# Altium PCB DSP5509_FPGACIII.PcbDoc (part 2 of 3)
Units mm, origin at the board's own origin, x right, y up, seen from the top; angles counter-clockwise.
Board outline 143.99 x 90.04 mm, 2 copper layers (Top Layer, Bottom Layer); 303 components, 256 nets, 1061 pads, 215 vias.
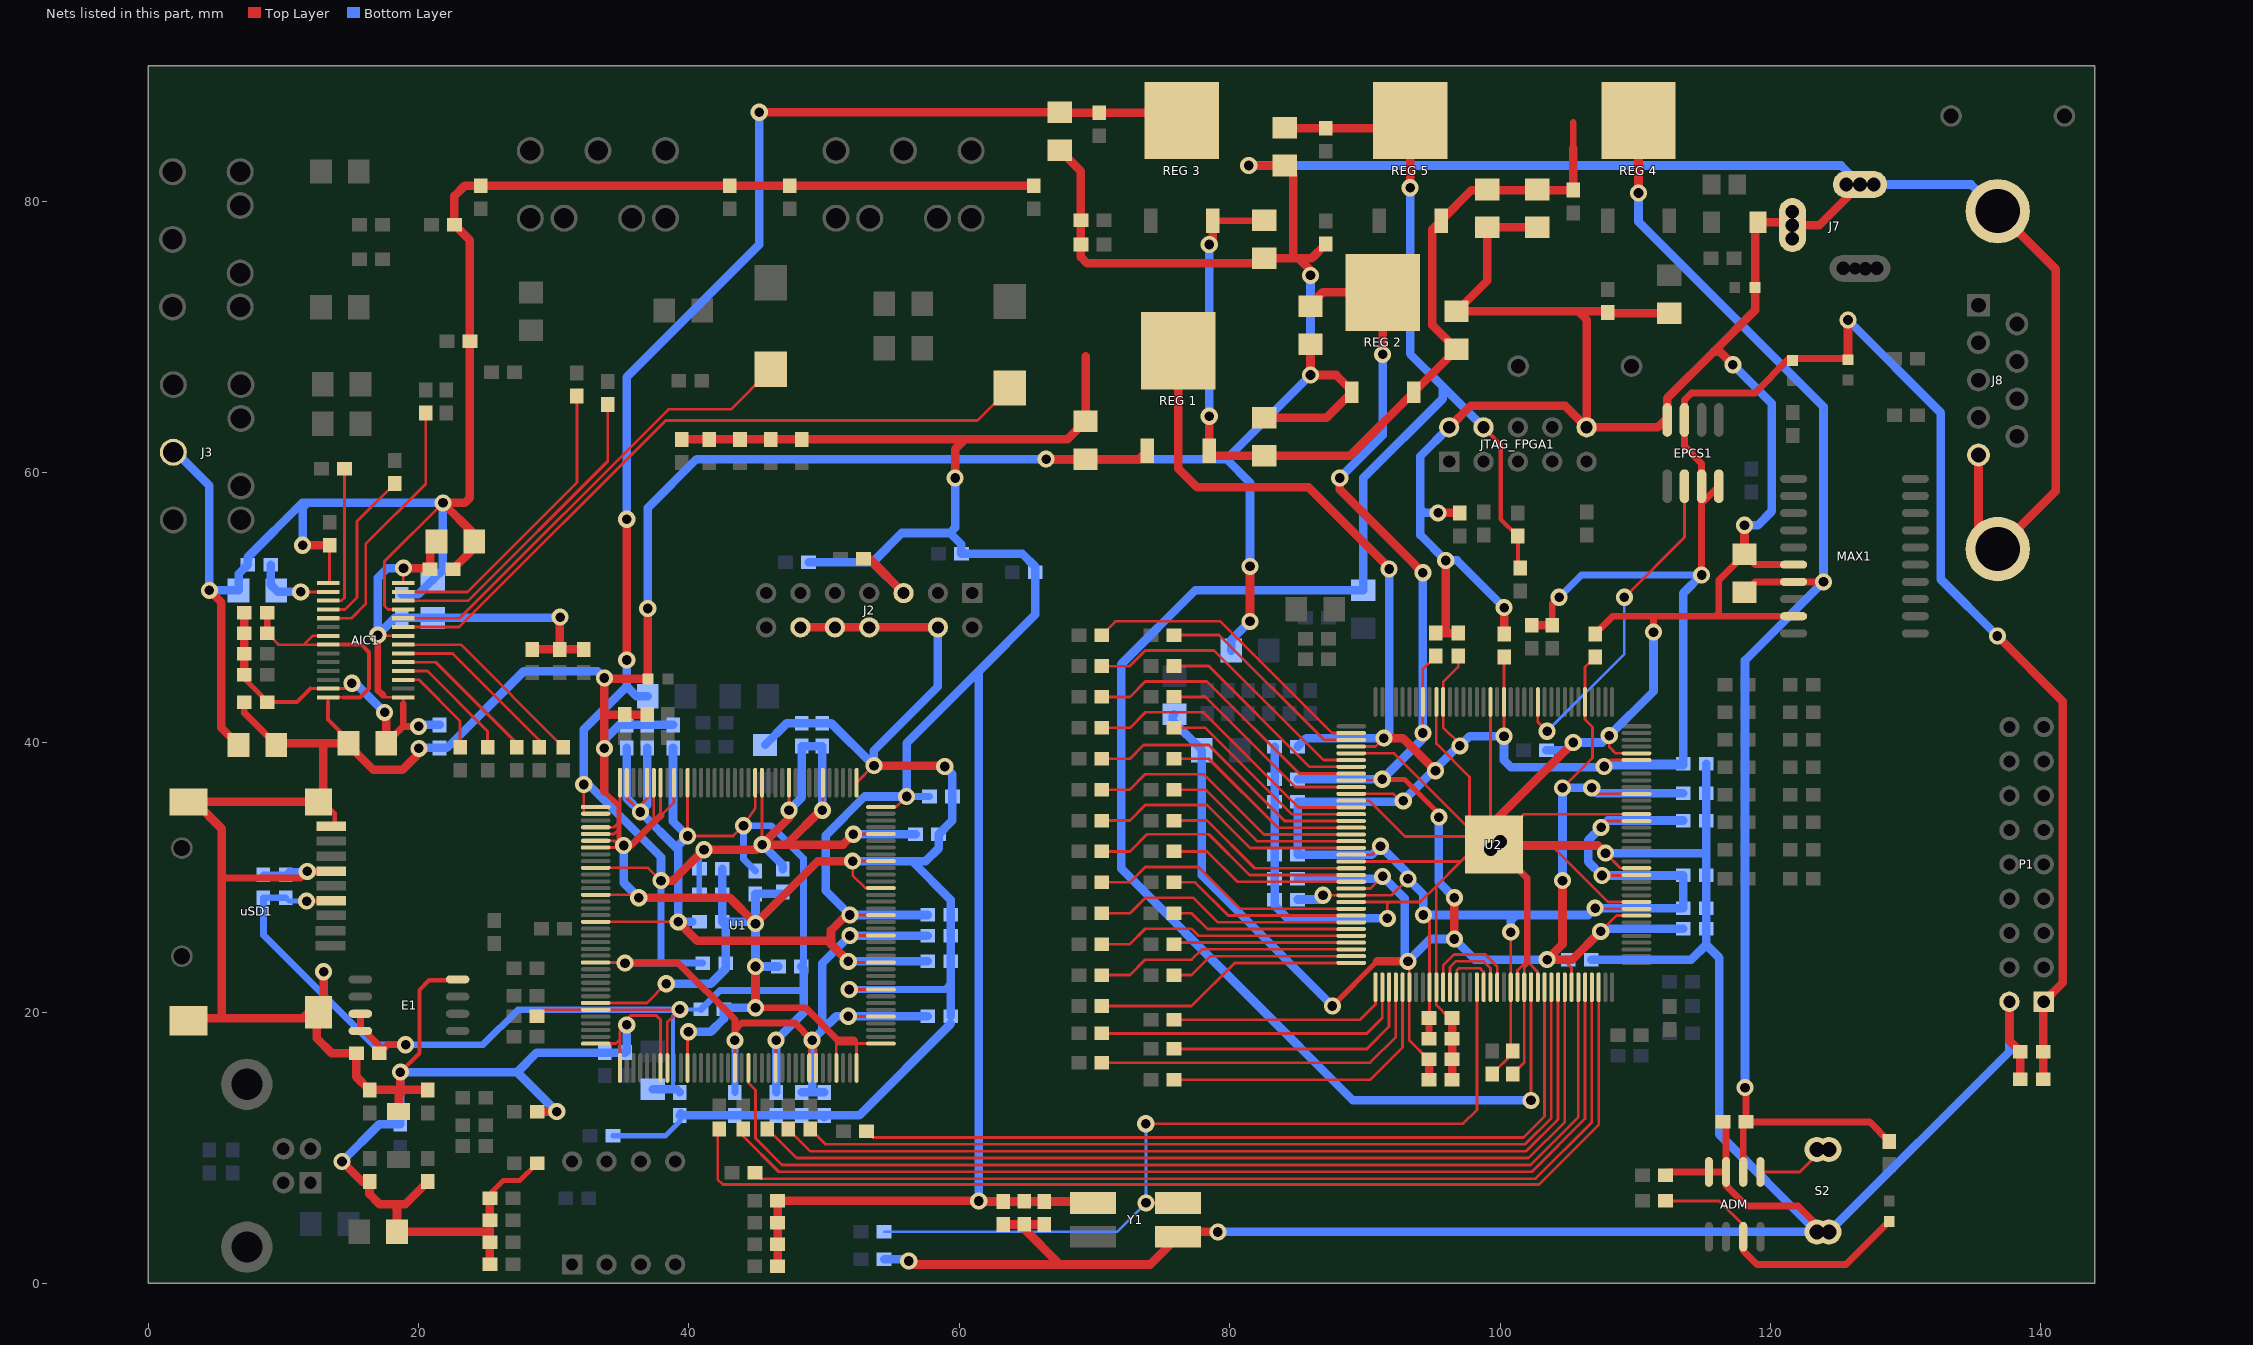
[diagram p2: the nets of this part, all layers, seen from the top]

## Via types
v1: diameter 1.27, hole 0.711, Top Layer to Bottom Layer, 197 vias
v2: diameter 0.66, hole 0.33, Top Layer to Bottom Layer, tented top, 16 vias
v3: diameter 1.5, hole 1, Top Layer to Bottom Layer, 2 vias

## Nets (pads, with @x,y where several pads share a name; then routed paths per layer and width w, separated by ;. In a path a pad name is that pad's centre, name@x,y a point inside that pad or via, vN(x,y) a via of type N, cw(c..) or ccw(c..) an arc to the next point about the centre after c; other vN are vias at no path point)
+3.3V: "REG 1.4" C17.1 C30.1 C31.1 C32.1 C33.2 C34.2 C35.1 C36.1 C37.1 C38.1 C39.1 C40.1 C41.1 C42.1 C43.1 C44.1 C45.1 C46.1 C47.1 C48.1 C49.1 C50.1 C51.1 C52.1 C53.1 C54.1 C55.1 C56.2 C69.1 C71.1 C72.1 C83.1 C112.2 C113.2 D6.1 D7.1 E1.7 E1.8 EPCS1.3 EPCS1.7 EPCS1.8 FB3.2 J2.5 P1.1 R10.2 R11.2 R12.2 R13.2 R14.2 R15.2 R16.2 R17.2 R25.1 R50.2 R51.2 R52.2 R53.2 R54.2 R116.1 R117.1 R118.1 U1.8 U1.24 U1.49 U1.56 U1.72 U1.88 U1.98 U1.104 U1.107 U1.126 U1.139 U2.17 U2.26 U2.40 U2.47 U2.56 U2.62 U2.81 U2.93 U2.117 U2.122 U2.130 U2.139 uSD1.4 Y1.4 | length 718.6
  Top Layer w0.203: R25.1@28.759,19.753 29.24,20.234 U1.139@33.107,20.234 ; U1.126@33.107,26.734 33.111,26.738 v1(39.212,26.738) ; U1.139@33.134,20.261 U1.139@33.107,20.234 ; U1.107@35.407,37.034 35.407,35.877 v1@36.164,35.12 ; v1(36.418,34.866) v1@36.164,35.12 ; U1.104@36.907,37.034 36.907,35.863 v1@36.164,35.12 ; U1.8@38.45,15.891 U1.8@38.407,15.934 38.407,19.329 39.312,20.234 U1.139@33.107,20.234 ; U1.98@39.907,37.034 v1(39.907,33.088) 43.276,33.088 v1(44.038,33.85) 44.907,35.14 U1.88@44.907,37.034 ; R53.2@41.498,62.425 R52.2@43.784,62.425 R51.2@46.07,62.425 ; U1.24@46.407,15.934 46.451,15.978 v1(46.451,17.975) ; v1(51.785,23.817) 51.868,23.734 U1.49@54.207,23.734 ; v1(51.912,27.246) 54.195,27.246 U1.56@54.207,27.234 ; U1.72@54.207,35.234 55.328,35.234 v1(56.103,36.009) ; v1(86.904,28.703) 91.977,28.703 v1(93.187,29.913) ; U2.47@88.987,36.203 92.104,36.203 92.679,35.628 v1@92.778,35.628 ; U2.56@88.999,31.691 U2.56@88.987,31.703 90.532,31.703 v1(91.155,32.326) ; U2.40@88.998,39.692 U2.40@88.987,39.703 90.785,39.703 v1(91.409,40.327) ; v1(94.33,27.246) 94.787,26.789 C50.1@94.787,19.753 ; U2.26@95.787,42.045 U2.26@95.787,43.003 ; U2.26@95.787,42.172 U2.26@95.787,43.003 ; C45.1@96.901,46.394 96.901,45.593 95.787,44.479 U2.26@95.787,43.003 ; v1(97.028,39.751) 97.028,39.878 95.787,41.119 U2.26@95.787,43.003 ; R116.1@99.371,15.435 R116.1@99.41,15.474 ; R116.1@99.41,15.65 R116.1@99.41,15.474 ; v1(100.287,40.466) U2.17@100.287,43.003 ; U2.17@100.287,42.867 U2.17@100.287,43.003 ; C44.1@100.287,46.323 U2.17@100.287,43.003 ; U2.17@100.299,42.991 U2.17@100.287,43.003 ; v1@100.787,26.21 v1(100.787,25.976) 100.787,17.321 C51.1@100.934,17.174 100.934,16.998 R116.1@99.41,15.474 ; v1@107.03,27.703 U2.117@110.087,27.703 ; v1(107.475,33.723) 107.955,34.203 U2.130@110.087,34.203 ; v1(107.538,30.167) 110.051,30.167 U2.122@110.087,30.203 ; v1(107.696,38.227) 108.172,38.703 U2.139@110.087,38.703
  Top Layer w0.381: v1(11.73,28.268) uSD1.4@13.815,28.268
  Top Layer w0.508: E1.7@15.704,19.939 E1.8@15.704,18.669 16.002,18.669 17.106,17.565 C17.1@17.106,17.018 17.741,17.653 v1(19.05,17.653) ; C83.1@94.75,18.102 C50.1@94.75,19.626 ; 103.855,49.852 R118.1@103.855,48.67 103.855,50.233 v1(104.363,50.741) ; v1(114.904,52.392) EPCS1.7@114.904,57.853 ; EPCS1.8@116.174,58.959 115.068,57.853 EPCS1.7@114.904,57.853 ; D7.1@125.73,68.394 121.381,68.394 118.841,65.854 114.142,65.854 113.634,65.346 EPCS1.3@113.634,63.859 113.634,61.917 114.904,60.647 EPCS1.7@114.904,58.959 EPCS1.7@114.904,57.853
  Top Layer w0.635: v1(39.212,26.738) 40.609,25.341 50.515,25.341 ; R54.2@39.466,62.425 R53.2@41.498,62.425 R52.2@43.784,62.425 R51.2@46.07,62.425 R50.2@48.356,62.425 60.421,62.425 ; R14.2@46.57,1.27 R15.2@46.57,2.879 R16.2@46.57,4.487 R17.2@46.57,6.096 v1(61.437,6.096) 61.476,6.057 C32.1@63.246,6.057 C30.1@66.294,6.057 69.767,6.057 Y1.4@69.875,5.949 ; v1(51.785,23.817) 50.515,25.087 50.515,25.341 ; v1(51.912,27.246) 51.658,27.246 50.515,26.103 50.515,25.341 ; R13.2@52.92,53.594 53.34,53.594 J2.5@55.88,51.054 ; v1@59.69,59.69 59.69,61.694 60.421,62.425 ; 69.342,68.58 C69.1@69.342,63.757 68.01,62.425 60.421,62.425 ; Y1.4@69.81,6.057 Y1.4@69.85,6.017 ; 76.2,68.978 76.2,60.266 77.597,58.869 85.852,58.869 91.79,52.931 v1(91.79,52.832) ; v1(91.409,40.327) 92.806,40.327 v1(95.219,37.914) ; R117.1@102.331,48.67 R118.1@103.855,48.67 ; D7.1@125.73,68.394 v1(125.73,71.247) ; v1(136.779,47.879) 141.605,43.053 141.605,22.225 P1.1@140.208,20.828 140.169,20.789 C113.2@140.169,17.145 C112.2@140.169,15.113
  Bottom Layer w0.203: C40.1@44.546,30.89 C40.1@44.927,30.509
  Bottom Layer w0.305: 38.831,14.634 38.831,19.753 v1@39.312,20.234 ; C36.1@39.303,14.126 C36.1@39.339,14.126 ; v1(39.339,20.261) C43.1@40.902,20.261
  Bottom Layer w0.381: C34.2@10.191,28.518 10.441,28.268 v1(11.73,28.268)
  Bottom Layer w0.508: C34.2@10.191,28.518 C33.2@8.54,28.518 8.54,25.75 16.637,17.653 v1(19.05,17.653) 24.765,17.653 27.346,20.234 v1@39.312,20.234 ; C43.1@40.902,20.261 42.299,21.658 48.229,21.658 48.483,21.404 ; C40.1@44.927,30.509 44.038,31.398 v1(44.038,33.85) 46.07,33.85 48.483,31.437 48.483,23.602 C56.2@48.317,23.436 ; v1(56.103,36.009) C35.1@57.793,36.009 ; v1(104.363,50.741) 106.014,52.392 v1(114.904,52.392)
  Bottom Layer w0.635: C72.1@35.402,39.604 35.402,35.882 v1(36.418,34.866) ; C71.1@36.926,39.604 36.926,35.374 v1(36.418,34.866) ; FB3.2@37.338,14.348 39.117,14.348 C36.1@39.339,14.126 ; C41.1@38.831,39.604 38.831,34.164 v1(39.907,33.088) 39.212,32.393 39.212,32.072 ; C42.1@40.267,26.738 v1(39.212,26.738) 39.212,32.072 ; C39.1@46.451,14.126 v1(46.451,17.975) 48.483,20.007 48.483,21.404 48.483,23.27 C56.2@48.317,23.436 ; R12.2@48.856,53.34 53.594,53.34 ; v1(51.785,23.817) C37.1@57.666,23.817 ; J2.5@55.88,51.054 53.594,53.34 ; C38.1@57.666,27.246 v1(51.912,27.246) 50.134,29.024 50.134,33.147 52.996,36.009 v1(56.103,36.009) 56.103,39.946 60.212,44.055 ; v1(59.69,59.563) 59.69,55.88 59.309,55.499 ; 60.226,44.069 61.437,45.28 ; 61.437,6.731 61.437,45.28 ; C49.1@85.02,28.389 86.59,28.389 v1(86.904,28.703) ; C46.1@85.02,39.692 85.655,40.327 v1(91.409,40.327) 91.79,40.708 v1(91.79,52.832) ; v1@96.901,39.751 v1(92.837,35.687) 92.778,35.628 C47.1@85.02,35.628 C48.1@85.02,31.691 90.52,31.691 v1(91.155,32.326) 93.187,30.294 v1(93.187,29.913) 94.33,28.77 v1(94.33,27.246) 101.188,27.246 ; v1(97.028,39.751) 97.743,40.466 v1(100.287,40.466) 100.287,38.688 100.807,38.168 ; v1(100.787,25.976) 100.787,26.845 101.188,27.246 ; 106.934,38.168 100.807,38.168 ; 108.339,38.334 C55.1@113.546,38.334 ; C54.1@113.546,34.231 107.983,34.231 v1(107.475,33.723) 106.527,32.775 106.527,31.178 v1(107.538,30.167) C52.1@113.546,30.167 C53.1@113.546,27.754 v1(107.03,27.754) 106.522,27.246 101.188,27.246 ; v1(114.904,52.392) 113.546,51.034 C55.1@113.546,38.422 107.891,38.422 v1(107.696,38.227) 107.637,38.168 100.807,38.168 ; v1(125.73,71.247) 132.588,64.389 132.588,52.07 v1(136.779,47.879) ; v1(36.418,34.866) 39.212,32.072 ; 53.594,53.34 55.753,55.499 59.309,55.499 ; 59.309,55.499 60.159,54.649 R11.2@60.159,53.975 64.643,53.975 65.62,52.998 R10.2@65.62,52.578 65.62,49.463 61.437,45.28
+5V: "REG 1.3" "REG 2.3" "REG 3.3" "REG 4.4" "REG 5.3" ADM.2 C27.2 C70.1 C82.1 C84.1 C87.1 C89.1 C111.1 MAX1.7 R46.2 R67.2 | length 172.1
  Top Layer w0.508: 78.739,78.596 C84.1@82.53,78.596 ; 105.41,83.947 105.41,85.852 ; 110.236,83.947 110.236,85.996 ; ADM.2@117.983,8.242 117.983,11.723 C27.2@118.198,11.938 ; C111.1@118.079,51.119 118.844,51.884 MAX1.7@121.707,51.884 v1(123.921,51.884) ; v1(118.11,14.478) 118.198,14.39 C27.2@118.198,11.938 ; R46.2@128.778,10.502 127.342,11.938 C27.2@118.198,11.938
  Top Layer w0.635: v1(78.486,76.835) 78.739,77.088 78.739,78.596 ; 105.41,83.947 R67.2@105.41,80.86 102.743,80.86 97.894,80.86 95.63,78.596 94.996,77.962 94.996,70.863 C82.1@96.774,69.085 96.774,69.072 93.598,65.896 88.913,61.211 C70.1@82.55,61.211 78.852,61.211 78.485,61.578 v1(78.486,64.135) ; v1(110.236,80.645) 110.236,83.947 ; v1(78.486,64.135) v1(78.486,64.135)
  Bottom Layer w0.635: v1(78.486,64.135) v1(78.486,76.835) ; v1(110.236,80.645) 110.236,78.523 123.921,64.838 v1(123.921,51.884) 118.11,46.073 v1(118.11,14.478)
A0: R89.2 U2.64 | length 20.2
  Top Layer w0.203: R89.2@70.542,29.659 72.613,29.659 73.756,30.802 77.693,30.802 80.792,27.703 U2.64@88.987,27.703
A1: R91.2 U2.65 | length 14.1
  Top Layer w0.203: R91.2@75.876,29.659 77.439,29.659 79.895,27.203 U2.65@88.987,27.203
A2: R93.2 U2.66 | length 19.7
  Top Layer w0.203: R93.2@70.542,27.373 72.613,27.373 73.756,28.516 77.312,28.516 79.125,26.703 U2.66@88.987,26.703
A3: R94.2 U2.67 | length 13.6
  Top Layer w0.203: R94.2@75.876,27.373 77.185,27.373 78.355,26.203 U2.67@88.987,26.203
A4: R95.2 U2.68 | length 19.1
  Top Layer w0.203: R95.2@70.542,25.087 72.613,25.087 73.756,26.23 77.185,26.23 77.712,25.703 U2.68@88.987,25.703
A5: R96.2 U2.69 | length 13.2
  Top Layer w0.203: R96.2@75.876,25.087 75.992,25.203 U2.69@88.987,25.203
A6: R97.2 U2.70 | length 19.2
  Top Layer w0.203: R97.2@70.542,22.801 72.613,22.801 73.756,23.944 77.185,23.944 77.944,24.703 U2.70@88.987,24.703
A7: R99.2 U2.71 | length 13.7
  Top Layer w0.203: R99.2@75.876,22.801 77.185,22.801 78.587,24.203 U2.71@88.987,24.203
A8: R100.2 U2.72 | length 19.8
  Top Layer w0.203: R100.2@70.542,20.515 77.185,20.515 80.373,23.703 U2.72@88.987,23.703
A9: R101.2 U2.73 | length 16.6
  Top Layer w0.203: R101.2@75.876,19.499 89.644,19.499 90.787,20.642 U2.73@90.787,21.903
A10: R102.2 U2.74 | length 23.5
  Top Layer w0.203: R102.2@70.542,18.483 77.947,18.483 90.139,18.483 91.287,19.631 U2.74@91.287,21.903
A11: R104.2 U2.75 | length 19.5
  Top Layer w0.203: R104.2@75.876,17.34 90.139,17.34 91.787,18.988 U2.75@91.787,21.903
A12: R106.2 U2.76 | length 26.2
  Top Layer w0.203: R106.2@70.542,16.324 90.393,16.324 92.287,18.218 U2.76@92.287,21.903
A13: R107.2 U2.77 | length 22.4
  Top Layer w0.203: R107.2@75.876,15.054 90.393,15.054 92.787,17.448 U2.77@92.787,21.903
AIC3.3V: AIC1.1 AIC1.8 AIC1.14 AIC1.27 C11.1 C12.1 C13.1 C14.1 C15.1 C16.1 C18.1 R24.2 R30.2 R32.2 R40.1 R41.1 R47.1 R48.1 | length 66.7
  Top Layer w0.203: 12.015,43.991 AIC1.27@13.323,43.991 14.682,43.991 v1(15.082,44.391) ; v1(16.987,47.947) 17.043,47.891 AIC1.8@18.873,47.891 ; 17.368,43.502 17.529,43.341 AIC1.1@18.873,43.341 18.873,42.867 ; AIC1.14@18.873,51.791 v1@18.873,52.881 ; v1(20.013,41.194) v1@20.035,41.216
  Top Layer w0.305: C16.1@8.82,42.994 11.018,42.994 12.015,43.991
  Top Layer w0.381: R48.1@7.12,44.733 C16.1@8.82,43.033
  Top Layer w0.508: R48.1@7.12,44.733 R48.1@7.12,45.026 ; C16.1@8.82,42.994 C16.1@8.82,43.033 ; v1(16.987,47.947) 16.987,43.883 17.368,43.502 ; C14.1@17.625,39.946 18.873,41.194 ; 18.873,42.867 18.873,41.194 ; v1(20.013,41.194) 18.873,41.194
  Top Layer w0.635: R48.1@7.12,45.026 R47.1@7.12,46.55 R40.1@7.12,48.074 R41.1@7.12,49.598 ; C14.1@17.625,39.946 v1@17.625,42.102 ; v1(18.892,52.9) C11.1@20.667,52.9 ; C11.1@20.867,52.832 20.867,54.398 C12.1@21.333,54.864 ; R32.2@28.417,46.892 R24.2@30.449,46.892 ; v1@30.449,49.276 R24.2@30.449,46.892 ; R30.2@32.227,46.892 R24.2@30.449,46.892
  Bottom Layer w0.203: v1@15.082,44.01 v1(15.082,44.391) ; v1(20.013,41.194) v1@20.123,41.304 ; C18.1@21.051,49.214 C18.1@21.054,49.214 ; C18.1@21.051,49.256 C18.1@21.266,49.256
  Bottom Layer w0.635: v1(15.082,44.391) 15.336,44.391 v1(17.495,42.232) ; v1(18.892,52.9) 17.721,52.9 16.987,52.166 v1(16.987,47.947) 18.254,49.214 C18.1@21.051,49.214 21.054,49.214 v1@30.48,49.214 ; v1@20.123,41.304 C13.1@21.559,41.304
  other v1: 30.48,49.276
AOE: R88.1 U2.105 | length 73.8
  Top Layer w0.203: R88.1@44.888,8.196 45.337,7.747 102.616,7.747 106.787,11.918 U2.105@106.787,21.903 U2.105@106.776,21.892
ARDY: U1.20 U2.103 | length 78.1
  Top Layer w0.203: U1.20@44.407,15.934 44.407,14.812 44.927,14.292 44.927,10.736 46.9,8.763 102.235,8.763 105.787,12.315 U2.103@105.787,21.903
ARE: R90.1 U2.106 | length 81.1
  Top Layer w0.203: R90.1@42.26,11.41 42.133,11.283 42.133,7.688 42.514,7.307 102.87,7.307 107.287,11.724 U2.106@107.287,21.903 U2.106@107.284,21.9
AWE: R92.1 U2.104 | length 75.2
  Top Layer w0.203: R92.1@44.038,11.41 44.038,10.863 46.646,8.255 102.362,8.255 106.287,12.18 U2.104@106.287,21.903
BE0: R103.1 U2.100 | length 68.4
  Top Layer w0.203: R103.1@47.34,11.41 48.971,9.779 101.933,9.779 104.287,12.133 U2.100@104.287,21.903
BE1: R105.1 U2.99 | length 66
  Top Layer w0.203: R105.1@48.991,11.117 R105.1@48.991,11.41 50.114,10.287 101.854,10.287 103.787,12.22 U2.99@103.787,21.903
CE2: R98.1 U2.101 | length 70.9
  Top Layer w0.203: R98.1@45.816,11.41 47.955,9.271 102.108,9.271 104.787,11.95 U2.101@104.787,21.903
CLK4: U2.83 U2.91 | length 7.9
  Top Layer w0.203: U2.83@95.787,21.903 95.787,23.524 96.588,24.325 98.902,24.325 99.787,23.44 U2.91@99.787,21.903
CLK5: U2.84 U2.90 | length 6.3
  Top Layer w0.203: U2.84@96.287,21.903 96.287,23.389 96.715,23.817 98.775,23.817 99.287,23.305 U2.90@99.287,21.903
CLK6: U2.85 U2.89 | length 4.5
  Top Layer w0.203: U2.85@96.787,21.903 96.787,23.127 96.969,23.309 98.521,23.309 98.787,23.043 U2.89@98.787,21.903
CLK12MHZ: R59.1 U2.88 Y1.3 | length 62.9
  Top Layer w0.203: v1@73.787,5.969 v1(73.807,5.949) Y1.3@76.175,5.949 ; v1(73.787,11.811) 97.271,11.811 98.287,12.827 98.287,14.546 ; U2.88@98.267,21.883 U2.88@98.287,21.903 98.287,14.546 ; 98.287,14.165 98.287,14.546
  Bottom Layer w0.203: R59.1@54.444,3.81 71.668,3.81 v1(73.807,5.949) v1@73.807,11.791
CLKMEM: R87.1 U2.98 | length 60.5
  Top Layer w0.203: R87.1@53.143,11.244 53.592,10.795 101.727,10.795 103.287,12.355 U2.98@103.287,21.903
D0: R71.1 U2.60 | length 14
  Top Layer w0.203: R71.1@75.876,31.945 78.328,31.945 80.57,29.703 U2.60@88.987,29.703
D1: R73.1 U2.59 | length 20.2
  Top Layer w0.203: R73.1@70.542,31.945 72.613,31.945 73.883,33.215 78.455,33.215 81.467,30.203 U2.59@88.987,30.203
D2: R75.1 U2.58 | length 14.6
  Top Layer w0.203: R75.1@75.876,34.231 78.328,34.231 81.856,30.703 U2.58@88.987,30.703
D3: R77.1 U2.55 | length 20.2
  Top Layer w0.203: R77.1@70.542,34.231 72.613,34.231 73.756,35.374 78.328,35.374 81.499,32.203 U2.55@88.987,32.203
D4: R79.1 U2.54 | length 14.7
  Top Layer w0.203: R79.1@75.876,36.517 78.201,36.517 82.015,32.703 U2.54@88.987,32.703
D5: R81.1 U2.53 | length 20.8
  Top Layer w0.203: R81.1@70.542,36.517 72.613,36.517 73.756,37.66 78.074,37.66 82.531,33.203 U2.53@88.987,33.203
D6: R83.1 U2.52 | length 15.2
  Top Layer w0.203: R83.1@75.876,38.803 78.455,38.803 83.555,33.703 U2.52@88.987,33.703
D7: R85.1 U2.51 | length 21.2
  Top Layer w0.203: R85.1@70.542,38.803 72.613,38.803 73.629,39.819 78.455,39.819 84.071,34.203 U2.51@88.987,34.203
D8: R72.2 U2.50 | length 15.8
  Top Layer w0.203: R72.2@75.876,41.089 78.201,41.089 84.587,34.703 U2.50@88.987,34.703
D9: R74.2 U2.49 | length 21.8
  Top Layer w0.203: R74.2@70.542,41.089 72.613,41.089 73.756,42.232 78.074,42.232 85.103,35.203 U2.49@88.987,35.203
D10: R76.2 U2.46 | length 16.4
  Top Layer w0.203: R76.2@75.876,43.375 78.201,43.375 84.873,36.703 86.583,36.703 ; 86.016,36.703 86.583,36.703 ; U2.46@88.987,36.703 86.583,36.703
D11: R78.2 U2.44 | length 21.7
  Top Layer w0.203: R78.2@70.542,43.375 72.613,43.375 73.756,44.518 78.328,44.518 85.143,37.703 U2.44@88.987,37.703
D12: R80.2 U2.43 | length 16.2
  Top Layer w0.203: R80.2@75.876,45.661 78.455,45.661 85.913,38.203 U2.43@88.987,38.203
D13: R82.2 U2.42 | length 22.3
  Top Layer w0.203: R82.2@70.561,45.644 72.596,45.644 73.756,46.804 78.836,46.804 86.937,38.703 U2.42@88.987,38.703
D14: R84.2 U2.39 | length 16.6
  Top Layer w0.203: R84.2@75.876,47.947 79.217,47.947 86.961,40.203 U2.39@88.987,40.203 ; U2.39@88.987,40.2 U2.39@89.25,40.2
D15: R86.2 U2.38 | length 22.3
  Top Layer w0.203: R86.2@70.542,47.947 71.558,48.963 79.307,48.963 87.567,40.703 U2.38@88.987,40.703
DCLK: EPCS1.6 U2.12 | length 24.8
  Top Layer w0.203: U2.12@102.787,43.003 102.787,41.522 v1(103.474,40.835) ; v1(109.189,50.741) 113.634,55.186 EPCS1.6@113.634,58.959
  Bottom Layer w0.203: v1(103.474,40.835) 109.189,46.55 v1(109.189,50.741)
DSP_CVCC: "REG 3.4" C57.2 C58.1 C59.1 C60.1 C61.1 C62.1 C63.1 C64.1 C65.1 C66.1 C67.1 C68.1 C85.1 FB2.1 R63.2 U1.18 U1.29 U1.30 U1.41 U1.53 U1.68 U1.78 U1.83 U1.87 U1.109 U1.110 U1.118 U1.132 | length 236.2
  Top Layer w0.203: v1(32.227,36.898) 32.227,34.866 32.359,34.734 U1.110@33.107,34.734 ; U1.132@33.107,23.734 v1@35.231,23.734 ; U1.118@33.107,30.734 36.994,30.734 v1(37.942,29.786) ; U1.18@43.407,15.934 v1@43.407,17.967 ; v1@45.407,32.481 U1.87@45.407,37.034 ; v1(47.407,34.993) U1.83@47.407,37.034 ; U1.29@48.907,15.934 48.907,17.764 49.407,17.264 U1.30@49.407,15.934 U1.30@49.372,15.899 ; U1.78@49.88,37.007 U1.78@49.907,37.034 v1@49.907,35.147 ; v1@51.804,19.734 U1.41@54.207,19.734 ; v1@51.924,25.734 U1.53@54.207,25.734 ; v1@52.185,33.234 U1.68@54.207,33.234
  Top Layer w0.508: v1(35.275,23.69) 39.212,23.69 43.403,19.499 43.403,18.737 ; v1(43.403,17.971) 43.403,18.737 ; v1(49.118,17.975) 47.848,19.245 43.911,19.245 43.403,18.737
  Top Layer w0.635: v1(35.402,46.101) v1(35.402,56.515) ; v1(37.942,29.786) 38.831,29.786 v1(41.117,32.072) 44.998,32.072 v1@45.407,32.481 ; v1(45.212,86.614) 45.215,86.617 C85.1@67.437,86.617 67.479,86.575 R63.2@70.358,86.575 75.875,86.575 76.454,85.996 ; v1(47.407,34.993) 47.407,34.425 v1(45.435,32.453) 47.213,32.453 ; v1@49.907,35.147 47.213,32.453 ; v1(52.166,33.215) 51.404,32.453 47.213,32.453
  Bottom Layer w0.381: C57.2@40.775,28.77 C59.1@40.775,30.675 40.775,31.73 v1(41.117,32.072)
  Bottom Layer w0.508: v1(35.275,23.69) 37.942,23.69 ; v1(37.942,29.786) 37.942,23.69 ; C58.1@41.029,23.69 37.942,23.69 ; C65.1@43.403,14.126 v1(43.403,17.971)
  Bottom Layer w0.635: v1(35.402,46.101) 35.402,44.137 ; v1(35.402,56.515) 35.402,67.025 45.212,76.835 v1(45.212,86.614) ; FB2.1@36.954,43.434 36.105,43.434 35.402,44.137 ; v1(37.942,29.786) 37.942,31.527 32.571,36.898 v1(32.227,36.898) 32.227,40.962 35.402,44.137 ; v1(45.435,32.453) 46.959,30.929 C61.1@46.959,30.636 ; v1(47.407,34.993) 48.356,35.942 C60.1@48.356,39.731 C63.1@49.88,39.731 v1(49.88,34.993) ; C66.1@48.356,14.126 49.118,14.126 ; C67.1@50.007,14.126 49.118,14.126 ; v1(52.166,33.215) C64.1@56.777,33.215 ; C68.1@57.666,19.753 v1(51.785,19.753) 50.896,19.753 49.88,18.737 ; C62.1@57.666,25.722 v1(51.912,25.722) 49.88,23.69 49.88,18.737 ; 49.118,14.126 v1(49.118,17.975) 49.88,18.737
FPGA_VCCA_2.5V: "REG 5.4" C90.1 FB14.2 JTAG_FPGA1.4 R69.2 R110.2 R112.2 U2.96 | length 146.7
  Top Layer w0.203: v1(102.287,13.53) U2.96@102.287,21.903
  Top Layer w0.305: JTAG_FPGA1.4@98.775,63.314 100.045,62.044 100.045,56.515 101.208,55.352 101.315,55.352 R110.2@101.315,53.078
  Top Layer w0.635: C90.1@84.074,85.474 84.116,85.432 R69.2@87.122,85.432 92.781,85.432 ; v1(93.345,81.026) 93.345,84.868 92.781,85.432 ; 93.345,85.996 92.781,85.432
  Bottom Layer w0.635: 83.154,19.499 81.376,21.277 ; v1(93.345,81.026) 93.345,68.744 95.754,66.335 ; JTAG_FPGA1.4@98.775,63.314 95.754,66.335 ; v1@102.16,13.403 v1(102.287,13.53) 89.123,13.53 81.376,21.277 ; 81.376,21.277 71.978,30.675 71.978,45.788 77.442,51.252 FB14.2@89.885,51.252 89.885,59.563 95.754,65.432 95.754,66.335
FPGA_VINT_1.2V: "REG 2.4" C73.1 C74.1 C75.1 C76.1 C77.1 C78.1 C79.1 C80.1 C81.1 C86.2 C91.1 FB15.2 U2.5 U2.29 U2.45 U2.61 U2.78 U2.102 U2.116 U2.134 | length 209.1
  Top Layer w0.203: U2.61@88.987,29.203 90.417,29.203 v1(91.313,30.099) ; U2.45@88.987,37.203 90.571,37.203 v1@90.647,37.279 ; v1(93.187,23.817) 93.287,23.717 U2.78@93.287,21.903 93.287,17.975 94.684,16.578 C74.1@94.75,16.578 ; v1(94.287,40.708) U2.29@94.287,43.003 94.287,45.431 C76.1@95.25,46.394 ; v1(104.617,36.644) 106.84,38.867 106.84,40.2 ; 104.687,23.944 105.287,23.344 U2.102@105.287,21.903 ; v1(106.776,36.644) 107.217,36.203 U2.134@110.087,36.203 ; 106.84,39.502 106.84,40.2 ; C77.1@107.03,46.335 106.287,45.592 U2.5@106.287,43.003 106.287,41.701 106.84,41.148 106.84,40.2 ; v1(107.442,26.035) 108.61,27.203 U2.116@110.087,27.203
  Top Layer w0.305: 104.617,29.151 v1(104.617,29.786)
  Top Layer w0.381: v1(87.599,20.515) 90.901,23.817 ; v1(91.282,37.279) 92.933,37.279 95.473,34.739 v1(95.473,34.485)
  Top Layer w0.635: C73.1@85.979,72.39 86.885,73.296 91.313,73.296 v1(91.313,68.707) ; v1(88.138,59.563) 88.138,58.711 93.06,53.789 ; 89.787,57.062 93.06,53.789 ; 90.901,23.817 v1(93.187,23.817) ; v1(94.287,52.562) 93.06,53.789 ; C86.2@94.75,15.054 C74.1@94.75,16.578 ; v1(96.616,25.468) v1(96.616,28.516) ; v1(104.617,29.786) 104.617,25.087 v1(103.474,23.944) 104.687,23.944 105.351,23.944 v1(107.442,26.035)
  Bottom Layer w0.305: C78.1@84.893,37.279 C78.1@85.02,37.279 ; v1@90.647,37.279 v1@90.858,37.279
  Bottom Layer w0.635: C91.1@75.915,42.102 75.788,41.975 75.788,41.594 FB15.2@77.944,39.438 77.944,30.17 v1(87.599,20.515) ; C80.1@85.02,29.913 89.123,29.913 ; C78.1@85.02,37.279 v1@90.647,37.279 ; v1(88.138,59.563) 91.313,62.738 v1(91.313,68.707) ; 90.52,29.913 89.123,29.913 ; v1(91.282,37.279) 94.287,40.284 v1(94.287,40.708) v1(94.287,52.562) ; 92.933,28.008 92.933,27.373 ; v1(95.473,34.485) 95.473,29.659 v1(96.616,28.516) ; v1(104.617,29.786) v1(104.617,36.644) v1(106.776,36.644) 107.157,36.263 C81.1@113.546,36.263 ; C75.1@105.037,23.944 v1(103.474,23.944) 98.14,23.944 v1(96.616,25.468) 94.838,25.468 v1(93.187,23.817) 92.933,24.071 92.933,27.373 ; v1(107.442,26.035) 107.637,26.23 C79.1@113.546,26.23 ; 89.123,29.913 91.127,29.913 v1(91.313,30.099) 92.933,28.479 92.933,27.373
GND: "REG 1.1" "REG 2.1" ADM.3 ADM.4 AIC1.21 AIC1.22 AIC1.28 C1.2 C4.2 C5.2 C6.2 C7.2 C8.2 C9.2 C13.2 C14.2 C16.2 C17.2 C27.1 C30.2 C31.2 C32.2 C33.1 C34.1 C35.2 C36.2 C37.2 C38.2 C39.2 C40.2 C41.2 C42.2 C43.2 C44.2 C45.2 C46.2 C47.2 C48.2 C49.2 C50.2 C51.2 C52.2 C53.2 C54.2 C55.2 C56.1 C57.1 C58.2 C59.2 C60.2 C61.2 C62.2 C63.2 C64.2 C65.2 C66.2 C67.2 C68.2 C69.2 C70.2 C71.2 C72.2 C73.2 C74.2 C75.2 C76.2 C77.2 C78.2 C79.2 C80.2 C81.2 C82.2 C83.2 C84.2 C85.2 C86.1 C87.2 C88.2 C89.2 C90.2 C111.2 C112.1 C113.1 D1.1 D3.2 D4.1 D5.2 E1.4 EPCS1.4 FB4.1 FB5.2 FB13.2 FB16.2 J2.4 J2.8 J2.10 J2.12 J7.2 J7.2A J7.2B J7.3 J7.3A J7.3B J8.5 J8.10 J8.11 JTAG_FPGA1.2 JTAG_FPGA1.10 MAX1.6 MAX1.9 P1.2 pad.2 pad.2C R6.2 R7.2 R8.2 R18.1 R19.1 R20.1 R21.1 R40.2 R41.2 R60.1 R61.1 R62.1 R64.1 R65.1 R68.1 R70.1 R115.2 R145.1 R147.2 S2.0@124.317,3.803 S2.1 U1.1 U1.7 U1.11 U1.33 U1.36 U1.37 U1.45 U1.60 U1.64 U1.73 U1.100 U1.102 U1.103 U1.108 U1.112 U1.113 U1.114 U1.115 U1.122 U1.138 U1.144 U2.19 U2.27 U2.41 U2.48 U2.57 U2.63 U2.82 U2.94 U2.95 U2.97 U2.118 U2.123 U2.131 U2.140 U2.145 uSD1.6 uSD1.9 uSD1.10 uSD1.11 uSD1.12 uSD1.13 Y1.2 | length 1213.8
  Top Layer w0.203: R40.2@8.82,48.074 9.653,47.241 11.526,47.241 ; AIC1.21@12.811,47.891 AIC1.21@13.323,47.891 12.176,47.891 11.526,47.241 ; 13.323,42.994 AIC1.28@13.323,43.341 14.447,43.341 ; 14.32,47.241 AIC1.22@13.323,47.241 11.526,47.241 ; U1.144@32.354,17.734 U1.144@33.107,17.734 ; U1.138@33.107,20.734 36.891,20.734 v1(38.323,22.166) ; U1.122@33.107,28.734 36.073,28.734 v1(36.291,28.516) ; U1.115@33.107,32.234 34.685,32.234 v1@34.835,32.385 ; U1.114@33.107,32.734 34.486,32.734 v1@34.835,32.385 ; U1.113@33.107,33.234 34.473,33.234 34.835,33.596 ; U1.112@33.486,33.734 U1.112@33.107,33.734 34.465,33.734 34.835,34.104 ; U1.144@34.018,17.734 U1.144@33.107,17.734 ; 34.835,35.306 34.907,35.377 U1.108@34.907,37.034 ; U1.1@34.907,15.934 34.907,18.034 ; v1@34.986,32.234 v1@34.835,32.385 ; U1.103@37.407,37.034 37.407,34.209 37.473,34.143 ; U1.7@37.907,15.934 37.907,19.497 37.592,19.812 35.687,19.812 35.402,19.527 v1(35.402,19.118) 34.907,18.623 34.907,18.034 ; U1.102@37.907,37.034 37.907,34.633 37.935,34.605 38.907,35.577 U1.100@38.907,37.034 ; U1.11@39.907,15.934 39.907,18.543 v1(39.974,18.61) ; U1.33@50.907,16.843 U1.33@50.907,15.934 50.907,17.76 51.073,17.926 ; v1(51.861,21.734) U1.45@54.207,21.734 ; 52.197,17.926 52.388,17.734 ; 52.407,17.454 U1.36@52.407,15.934 52.407,17.716 52.388,17.734 ; U1.37@54.207,17.734 52.388,17.734 ; U1.60@54.207,29.234 53.055,29.234 52.115,30.174 v1(52.115,31.234) U1.64@54.207,31.234 ; U2.63@88.987,28.203 91.79,28.203 ; U2.57@88.987,31.203 97.087,31.203 ; U2.48@88.987,35.703 90.318,35.703 92.968,33.053 U2.145@97.737,33.053 ; U2.41@88.987,39.203 92.152,39.203 98.302,33.053 U2.145@98.937,33.053 ; v1(91.663,26.992) 91.663,28.076 91.79,28.203 ; U2.27@95.287,43.003 95.287,39.915 97.737,37.465 U2.145@97.737,34.253 ; C50.2@96.45,19.626 96.235,19.626 95.287,20.574 U2.82@95.287,21.903 95.287,29.403 ; U2.145@97.737,31.853 97.087,31.203 ; U2.145@98.14,33.469 U2.145@98.287,33.616 ; U2.19@99.287,43.003 99.287,33.465 U2.145@99.41,33.342 ; C51.2@100.934,15.474 101.787,16.327 U2.95@101.787,21.903 101.787,23.362 102.124,23.698 ; U2.94@101.287,21.903 101.287,23.154 101.977,23.845 ; U2.145@101.337,34.253 101.787,34.703 U2.131@110.087,34.703 ; 102.005,24.071 102.005,23.817 102.124,23.698 ; U2.97@102.787,21.903 102.787,23.035 102.124,23.698 ; 103.796,32.385 107.978,28.203 U2.118@110.087,28.203 ; v1(107.792,31.818) 108.907,30.703 U2.123@110.087,30.703 ; v1(108.077,40.513) 108.077,39.661 108.535,39.203 ; 108.3,39.438 108.535,39.203 ; U2.140@110.087,39.203 108.535,39.203 ; 120.492,49.344 MAX1.9@121.607,49.344 ; U1.144@33.107,17.734 34.607,17.734 34.907,18.034 ; U1.73@52.42,37.047 U1.73@52.407,37.034 U1.73@52.42,37.047 ; U1.73@52.42,37.047 v1@53.668,38.295 ; v1@53.668,38.295 v1(53.69,38.295) v1@53.668,38.295 ; 91.79,28.203 94.087,28.203 95.287,29.403 ; 95.287,29.403 97.087,31.203
  Top Layer w0.305: uSD1.10@13.208,35.56 13.175,35.593 12.965,35.593 13.815,34.743 uSD1.9@13.815,33.818 ; 13.323,42.994 13.323,41.705 C14.2@14.828,40.2 ; 14.32,47.241 15.788,47.241 16.352,46.677 16.352,44.01 15.683,43.341 14.447,43.341 ; v1(18.669,15.621) 20.066,17.018 20.066,21.689 20.797,22.42 E1.4@22.067,22.42
  Top Layer w0.381: R21.1@25.281,6.291 25.281,6.612 26.289,7.62 27.52,7.62 C6.2@28.79,8.89 ; 33.751,36.39 34.835,35.306 34.835,34.104 34.835,33.596 v1@34.835,32.385
  Top Layer w0.508: 5.461,29.972 11.275,29.972 v1(11.771,30.468) uSD1.6@13.815,30.468 ; C16.2@7.12,42.994 7.12,42.196 FB13.2@9.497,39.819 ; R40.2@8.82,48.074 R41.2@8.82,49.598 ; v1(35.179,32.385) 35.715,32.385 37.473,34.143 37.935,34.605 ; v1(44.927,20.388) 48.61,20.388 51.073,17.926 ; U2.145@99.537,32.453 102.005,29.985 102.005,23.817 ; JTAG_FPGA1.10@106.395,63.314 JTAG_FPGA1.10@106.686,63.605 ; C77.2@107.03,48.035 108.339,49.344 111.348,49.344 ; v1(111.348,48.164) 111.348,49.344 ; R145.1@112.229,8.001 112.47,8.242 ADM.4@115.443,8.242 ADM.3@116.713,8.242 ; C27.1@116.498,11.938 116.713,11.723 ADM.3@116.713,8.242 ; MAX1.9@121.607,49.344 115.92,49.344 ; MAX1.6@121.607,53.154 118.844,53.154 C111.2@118.079,53.919 116.174,52.014 116.174,49.598 115.92,49.344 ; S2.1@123.825,3.81 123.825,3.937 122.047,5.715 118.237,5.715 116.713,7.239 ADM.3@116.713,8.242 ; 111.348,49.344 115.92,49.344
  Top Layer w0.635: uSD1.12@3.665,19.618 5.461,19.618 ; FB13.2@9.624,39.946 12.827,39.946 ; uSD1.13@12.49,19.934 uSD1.13@12.49,20.643 ; uSD1.10@12.54,35.618 3.465,35.618 5.461,33.622 5.461,29.972 5.461,19.618 ; uSD1.10@12.954,35.604 12.954,39.819 12.827,39.946 ; v1(12.985,23.046) 12.985,21.138 uSD1.13@12.49,20.643 ; v1(14.351,9.017) 15.836,7.532 R8.2@16.383,7.532 16.383,6.604 17.145,5.842 18.161,5.842 ; C14.2@14.825,39.946 C14.2@14.698,39.946 ; D1.1@18.542,12.697 18.542,13.931 18.923,14.312 ; v1(18.669,15.621) 18.669,14.566 18.415,14.312 ; v1(20.035,39.565) 20.035,39.212 18.796,37.973 16.671,37.973 C14.2@14.762,39.883 ; C4.2@20.701,14.312 18.923,14.312 ; C5.2@20.704,7.529 C5.2@20.701,7.532 19.011,5.842 18.161,5.842 ; R18.1@25.281,1.397 R19.1@25.281,3.028 R20.1@25.281,4.66 R21.1@25.281,6.291 ; 25.281,3.81 FB4.1@18.418,3.81 18.418,5.585 18.161,5.842 ; C7.2@28.79,12.7 v1(30.226,12.7) ; 33.751,36.39 v1(33.751,39.565) v1(33.751,44.772) 33.819,44.704 D3.2@36.969,44.704 36.957,44.716 v1(36.957,49.911) ; 34.044,42.066 R62.1@35.275,42.066 R61.1@36.926,42.066 ; v1(36.291,28.516) 43.022,28.516 v1(44.927,26.611) 49.55,31.234 v1(52.115,31.234) ; v1(44.927,20.388) v1(44.927,23.436) ; J2.12@48.26,48.514 J2.10@50.8,48.514 J2.8@53.34,48.514 J2.4@58.42,48.514 ; 51.073,17.926 52.197,17.926 ; v1(53.69,38.295) 58.86,38.295 v1(58.928,38.227) ; v1(56.261,1.651) 56.515,1.397 67.437,1.397 ; C32.2@63.246,4.357 C31.2@64.801,4.357 ; C30.2@66.294,4.357 C31.2@64.801,4.357 ; v1(66.421,60.96) 66.424,60.957 C69.2@69.342,60.957 73.294,60.957 73.915,61.578 ; C85.2@67.437,83.817 69,82.254 R65.1@69,78.613 R64.1@69,76.835 69,75.907 69.469,75.438 82.172,75.438 C84.2@82.55,75.816 84.709,75.816 ; v1(79.128,3.803) 76.529,3.803 Y1.2@76.175,3.449 74.123,1.397 67.437,1.397 ; v1(81.407,82.677) 81.41,82.674 C90.2@84.074,82.674 84.709,82.039 84.709,75.816 ; v1(81.503,48.963) v1(81.503,53.027) ; C70.2@82.55,64.011 87.143,64.011 89.028,65.896 ; v1(85.979,74.549) 85.979,74.927 85.09,75.816 ; C73.2@86.551,69.466 C73.2@85.979,69.466 v1(85.979,67.183) 87.868,67.183 89.155,65.896 ; R70.1@87.122,76.874 86.064,75.816 85.09,75.816 ; C76.2@95.25,48.094 95.981,48.094 ; v1(95.416,56.984) R147.2@97.028,56.984 ; v1(95.981,53.467) 95.981,48.094 ; JTAG_FPGA1.2@96.235,63.314 97.818,64.897 104.812,64.897 JTAG_FPGA1.10@106.395,63.314 ; C86.1@96.45,15.054 C74.2@96.45,16.578 C50.2@96.45,19.626 ; C45.2@96.901,48.094 95.981,48.094 ; U2.145@99.537,32.453 99.537,34.132 v1(105.41,40.005) ; C44.2@100.299,48.035 v1(100.299,49.979) ; U2.145@100.711,32.385 103.796,32.385 107.225,32.385 v1(107.792,31.818) ; C87.2@102.743,78.102 C89.2@99.06,78.102 99.06,74.171 C82.2@96.774,71.885 105.791,71.885 ; EPCS1.4@112.364,63.859 EPCS1.4@112.364,64.008 ; C88.2@112.522,71.752 107.992,71.752 R68.1@107.95,71.794 107.859,71.885 105.791,71.885 ; v1(117.221,67.945) 116.247,68.919 115.81,68.919 ; C111.2@118.079,53.919 v1(118.079,56.075) ; pad.2C@126.619,81.273 123.619,78.273 pad.2@121.619,78.273 121.406,78.486 D4.1@119.073,78.486 118.86,78.273 D5.2@118.86,73.66 118.86,71.969 115.81,68.919 ; J8.5@135.384,61.262 135.384,55.727 J8.11@136.804,54.307 141.097,58.6 141.097,75.004 J8.10@136.804,79.297 ; P1.2@137.668,20.828 137.668,17.946 C113.1@138.469,17.145 C112.1@138.469,15.113 ; 5.461,19.618 11.465,19.618 uSD1.13@12.49,20.643 ; uSD1.13@12.49,20.643 12.49,18.117 13.589,17.018 C17.2@15.406,17.018 15.406,15.289 R7.2@16.383,14.312 18.415,14.312 ; 12.827,39.946 C14.2@14.698,39.946 ; C14.2@14.698,39.946 C14.2@14.762,39.883 ; C14.2@14.698,39.946 C14.2@14.762,39.883 ; 18.415,14.312 18.923,14.312 ; C31.2@64.801,4.357 C31.2@64.801,4.377 C31.2@64.801,4.357 ; C31.2@64.801,4.357 64.801,4.033 67.437,1.397 ; 84.709,75.816 85.09,75.816 ; 105.791,71.885 106.395,71.281 JTAG_FPGA1.10@106.395,63.314 ; JTAG_FPGA1.10@106.395,63.314 111.67,63.314 EPCS1.4@112.364,64.008 ; EPCS1.4@112.364,64.008 112.364,65.473 115.81,68.919
  Bottom Layer w0.203: C13.2@21.559,39.604 C13.2@21.598,39.604 ; v1(33.751,39.565) v1@33.751,39.653 ; C72.2@35.109,41.304 C72.2@35.402,41.304 ; C42.2@42.475,26.738 C42.2@42.602,26.611 ; C43.2@42.602,20.261 C43.2@42.729,20.388 ; C61.2@46.871,28.809 C61.2@46.959,28.897 ; C35.2@59.493,36.003 C35.2@59.493,36.009 ; C47.2@83.193,35.628 83.32,35.501 C48.2@83.32,31.691 C80.2@83.32,29.913 ; C47.2@83.32,35.628 C78.2@83.32,37.279
  Bottom Layer w0.381: R6.2@34.378,10.922 38.264,10.922 39.339,11.997 C36.2@39.339,12.426
  Bottom Layer w0.508: C33.1@8.54,30.218 C34.1@10.191,30.218 10.441,30.468 v1(11.771,30.468) ; v1(51.861,21.734) 58.934,21.734 59.366,22.166
  Bottom Layer w0.635: v1(14.351,9.017) 17.106,11.772 C1.2@18.669,11.772 v1(18.669,15.621) 27.305,15.621 ; v1@20.074,39.604 C13.2@21.559,39.604 21.598,39.604 22.106,39.604 27.782,45.28 33.243,45.28 v1(33.751,44.772) ; v1(30.226,12.7) 27.305,15.621 ; v1(33.751,39.565) 33.751,40.2 34.855,41.304 C72.2@35.402,41.304 C71.2@36.926,41.304 C41.2@38.831,41.304 ; v1(35.179,32.385) 35.179,29.628 v1(36.291,28.516) ; v1(35.402,19.118) 35.402,17.163 C9.2@35.306,17.067 C8.2@33.782,17.067 28.751,17.067 27.305,15.621 ; v1(36.957,49.911) 36.957,57.345 40.572,60.96 v1(66.421,60.96) 79.756,60.96 ; v1(38.323,22.166) 41.625,22.166 42.729,23.27 C58.2@42.729,23.69 42.729,26.484 C42.2@42.475,26.738 ; C36.2@39.339,12.426 C36.2@39.407,12.426 ; C36.2@39.407,12.573 C36.2@39.407,12.426 ; v1(39.974,18.61) 41.625,18.61 42.602,19.587 C43.2@42.602,20.261 ; C59.2@42.475,30.675 C57.1@42.475,28.77 C42.2@42.475,26.738 ; C42.2@42.602,26.611 C42.2@42.475,26.738 ; C43.2@42.729,20.388 v1(44.927,20.388) ; FB5.2@45.637,39.822 47.246,41.431 C60.2@48.356,41.431 C63.2@49.88,41.431 ; C56.1@46.617,23.436 v1(44.927,23.436) v1(44.927,26.611) ; C61.2@46.871,28.809 C40.2@44.927,28.809 v1(44.927,26.611) ; C67.2@50.007,12.299 C67.2@50.007,12.426 ; C63.2@50.134,41.431 C63.2@49.88,41.431 ; v1(52.115,31.234) 56.496,31.234 ; v1@53.668,38.295 50.532,41.431 C63.2@49.88,41.431 ; v1(53.69,38.295) 53.69,39.407 58.42,44.137 J2.4@58.42,48.514 ; R60.1@54.444,1.778 56.134,1.778 v1(56.261,1.651) ; v1(58.928,38.227) 59.493,37.662 C35.2@59.493,36.009 59.493,34.231 ; 59.366,19.195 52.597,12.426 C67.2@50.007,12.426 ; C68.2@59.366,19.753 59.366,22.166 C37.2@59.366,23.817 C62.2@59.366,25.722 C38.2@59.366,27.246 59.366,28.364 56.496,31.234 ; 59.399,34.137 C64.2@58.477,33.215 58.477,32.188 57.523,31.234 56.496,31.234 ; v1@79.121,3.81 v1(79.128,3.803) S2.1@123.428,3.803 ; FB16.2@80.103,46.804 80.103,47.563 v1(81.503,48.963) ; v1(81.407,82.677) 120.142,82.677 ; v1(81.503,53.027) 81.503,59.213 79.756,60.96 ; C46.2@83.32,39.692 C78.2@83.32,37.279 C47.2@83.32,35.628 C48.2@83.32,31.691 C80.2@83.32,29.913 C49.2@83.32,28.389 83.32,27.969 84.297,26.992 v1(91.663,26.992) ; v1(85.979,74.549) v1(85.979,67.183) 79.756,60.96 ; v1(95.416,56.984) 94.4,56.984 94.107,57.277 ; JTAG_FPGA1.2@96.235,63.314 94.107,61.186 94.107,57.277 ; v1(100.299,49.979) 96.811,53.467 v1(95.981,53.467) 94.107,55.341 94.107,57.277 ; R115.2@103.435,39.438 104.843,39.438 v1(105.41,40.005) 107.569,40.005 v1(108.077,40.513) 111.348,43.784 v1(111.348,48.164) ; C75.2@106.737,23.944 114.142,23.944 115.246,25.048 ; v1(107.792,31.818) 114.992,31.818 115.246,31.564 ; C55.2@115.246,38.422 C81.2@115.246,36.263 C54.2@115.246,34.231 115.246,31.564 ; v1(117.221,67.945) 120.092,65.074 120.092,57.1 119.067,56.075 v1(118.079,56.075) ; 121.031,82.677 120.142,82.677 ; S2.1@123.825,3.937 123.294,3.937 116.205,11.026 116.205,24.089 115.246,25.048 ; S2.1@124.324,3.81 137.668,17.154 P1.2@137.668,20.828 ; pad.2C@126.365,81.273 pad.2C@126.619,81.273 ; pad.2C@127.127,81.273 pad.2C@126.619,81.273 ; J8.10@136.804,79.297 134.828,81.273 J7.2B@127.619,81.273 pad.2C@126.619,81.273 ; C36.2@39.407,12.426 45.308,12.426 C67.2@50.007,12.426 ; C42.2@42.475,26.738 44.8,26.738 v1(44.927,26.611) ; 115.246,25.048 C79.2@115.246,26.23 C53.2@115.246,27.754 C52.2@115.246,30.167 115.246,31.564 ; 120.142,82.677 125.215,82.677 pad.2C@126.619,81.273
  other v3: 99.318,32.107 100.01,32.672
GND_AIC: AIC1.11 AIC1.15 C11.2 C12.2 C15.2 C18.2 C20.2 C21.2 C22.2 FB13.1 J3.1 R42.1 R43.1 R44.1 R45.1 R56.1 R57.1 | length 146.9
  Top Layer w0.203: AIC1.15@13.431,51.899 C20.2@13.431,54.59 ; AIC1.11@18.873,49.841 17.76,49.841 17.495,50.106 17.495,53.408 v1(21.813,57.726)
  Top Layer w0.635: v1(4.541,51.249) 5.431,50.359 5.431,41.085 FB13.1@6.697,39.819 ; v1(11.438,54.59) C20.2@13.431,54.59 ; C11.2@22.567,52.832 24.133,54.398 C12.2@24.133,54.864 24.133,55.406 v1(21.813,57.726) 23.425,57.726 23.806,58.107 R42.1@23.806,69.664 23.806,77.157 R43.1@22.663,78.3 22.663,80.42 23.425,81.182 R56.1@24.607,81.182 R44.1@47.467,81.182 R45.1@65.501,81.182
  Bottom Layer w0.635: J3.1@1.997,61.536 4.541,58.992 v1(4.541,51.249) C22.2@6.697,51.249 6.697,52.474 C21.2@7.377,53.154 7.377,53.704 11.399,57.726 11.78,57.726 ; v1(11.438,54.59) 11.438,57.384 11.78,57.726 ; C15.2@18.765,50.956 19.993,50.956 C18.2@21.051,52.014 21.813,52.776 v1(21.813,57.726) 11.78,57.726
NetADM_1: ADM.1 S2.0@124.317,9.899 S2.2 | length 5.3
  Top Layer w0.203: ADM.1@119.253,8.242 122.161,8.242 S2.2@123.825,9.906
NetADM_7: ADM.7 R146.2 RESET.2 | length 20.9
  Top Layer w0.203: R146.2@112.229,6.096 116.205,6.096 117.983,4.318 ADM.7@117.983,3.442 ADM.7@117.983,2.413
  Top Layer w0.508: ADM.7@117.983,2.413 118.999,1.397 125.591,1.397 RESET.2@128.778,4.584
NetAIC1_3: AIC1.3 R38.1 | length 7.4
  Top Layer w0.203: AIC1.3@18.873,44.641 20.039,44.641 23.083,41.597 R38.1@23.083,39.653
NetAIC1_4: AIC1.4 R29.1 | length 9.3
  Top Layer w0.203: AIC1.4@18.873,45.291 20.659,45.291 25.115,40.835 R29.1@25.115,39.653
NetAIC1_5: AIC1.5 R36.1 | length 11.2
  Top Layer w0.203: AIC1.5@18.873,45.941 21.279,45.941 27.274,39.946 R36.1@27.274,39.653
NetAIC1_6: AIC1.6 R39.1 | length 13.2
  Top Layer w0.203: AIC1.6@18.873,46.591 22.534,46.591 28.925,40.2 R39.1@28.925,39.653
NetAIC1_7: AIC1.7 R35.1 | length 15
  Top Layer w0.203: AIC1.7@18.873,47.241 23.139,47.241 30.703,39.677 R35.1@30.703,39.653
NetAIC1_9: AIC1.9 C26.1 | length 52.2
  Top Layer w0.203: AIC1.9@18.873,48.541 23.014,48.541 38.295,63.822 56.509,63.822 61.335,63.822 C26.1@63.723,66.21
NetAIC1_10: AIC1.10 C25.1 | length 34.8
  Top Layer w0.203: AIC1.10@18.873,49.191 23.029,49.191 38.481,64.643 43.106,64.643 C25.1@46.07,67.607
NetAIC1_12: AIC1.12 C28.2 | length 23.6
  Top Layer w0.203: AIC1.12@18.873,50.491 23.694,50.491 34.005,60.802 C28.2@34.005,65.004
NetAIC1_13: AIC1.13 C29.2 | length 22.6
  Top Layer w0.203: AIC1.13@18.873,51.141 23.622,51.141 31.719,59.238 C29.2@31.719,65.639
NetAIC1_16: AIC1.16 C21.1 C22.1 | length 6
  Top Layer w0.203: v1@11.272,51.122 v1(11.291,51.141) AIC1.16@13.323,51.141
  Bottom Layer w0.635: C21.1@9.077,53.154 9.077,51.669 C22.1@9.497,51.249 9.605,51.141 v1(11.291,51.141)
NetAIC1_17: AIC1.17 R26.1 | length 10.9
  Top Layer w0.203: AIC1.17@13.323,50.491 14.324,50.491 14.535,50.702 R26.1@14.535,60.266
NetAIC1_18: AIC1.18 R28.1 | length 12.1
  Top Layer w0.203: AIC1.18@13.323,49.841 14.563,49.841 15.463,50.741 15.463,56.368 R28.1@18.257,59.162
NetAIC1_19: AIC1.19 C23.1 | length 19.2
  Top Layer w0.203: AIC1.19@13.323,49.191 15.056,49.191 16.098,50.233 16.098,54.678 20.543,59.123 C23.1@20.543,64.369